# Altium PCB Rotary Encoder.PcbDoc
Units mm, origin at the board's own origin, x right, y up, seen from the top; angles counter-clockwise.
Board outline 55 x 55 mm, 2 copper layers (Top Layer, Bottom Layer), stack 1.621 mm thick; 24 components, 16 nets, 65 pads, 4 vias.
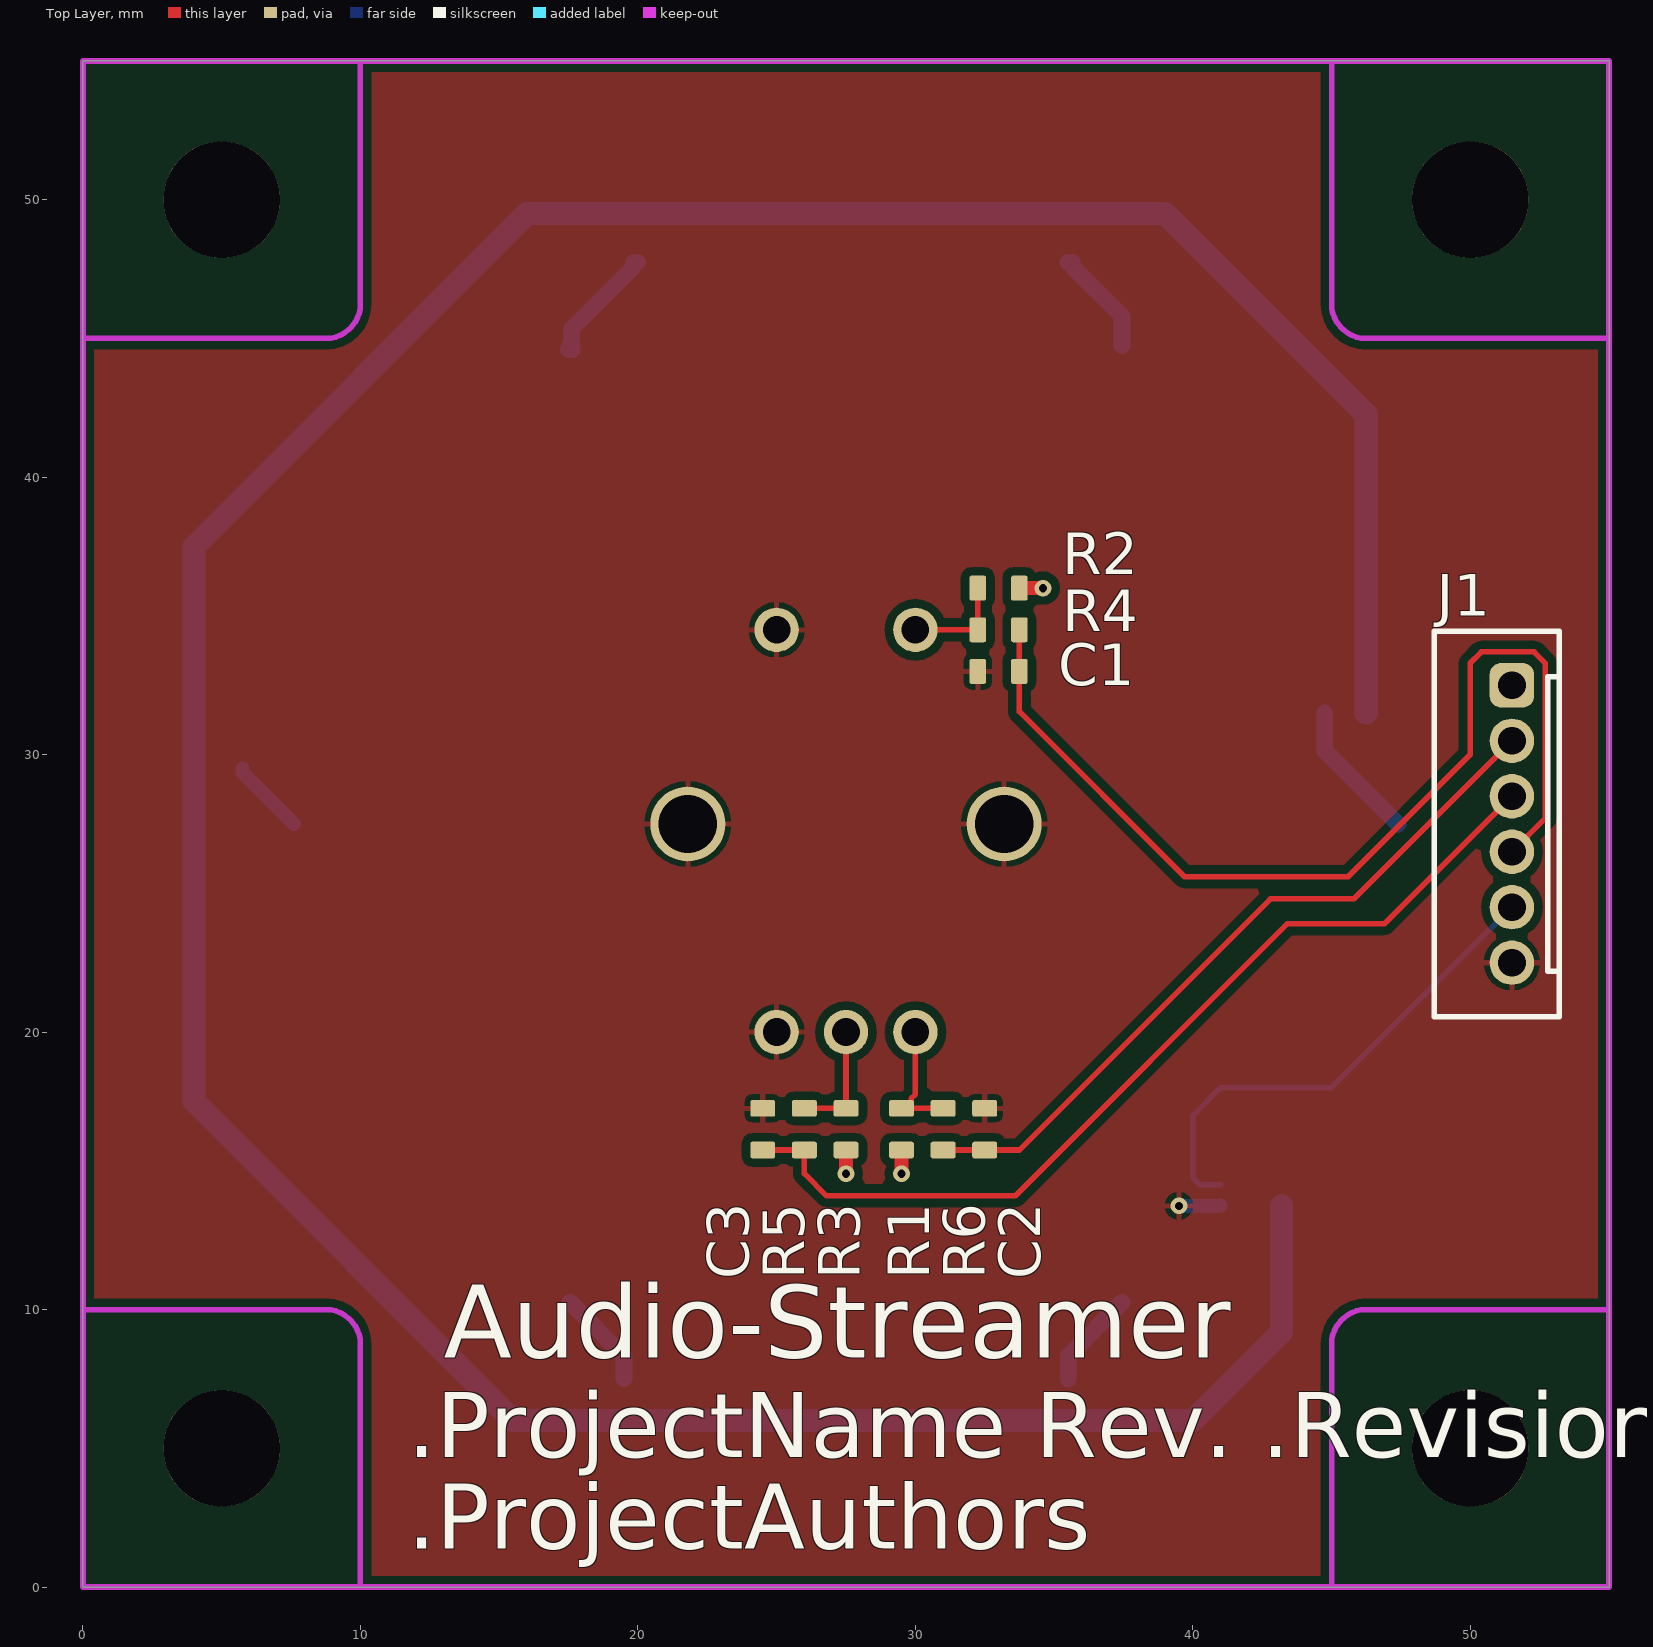
[diagram p0: Top Layer view]
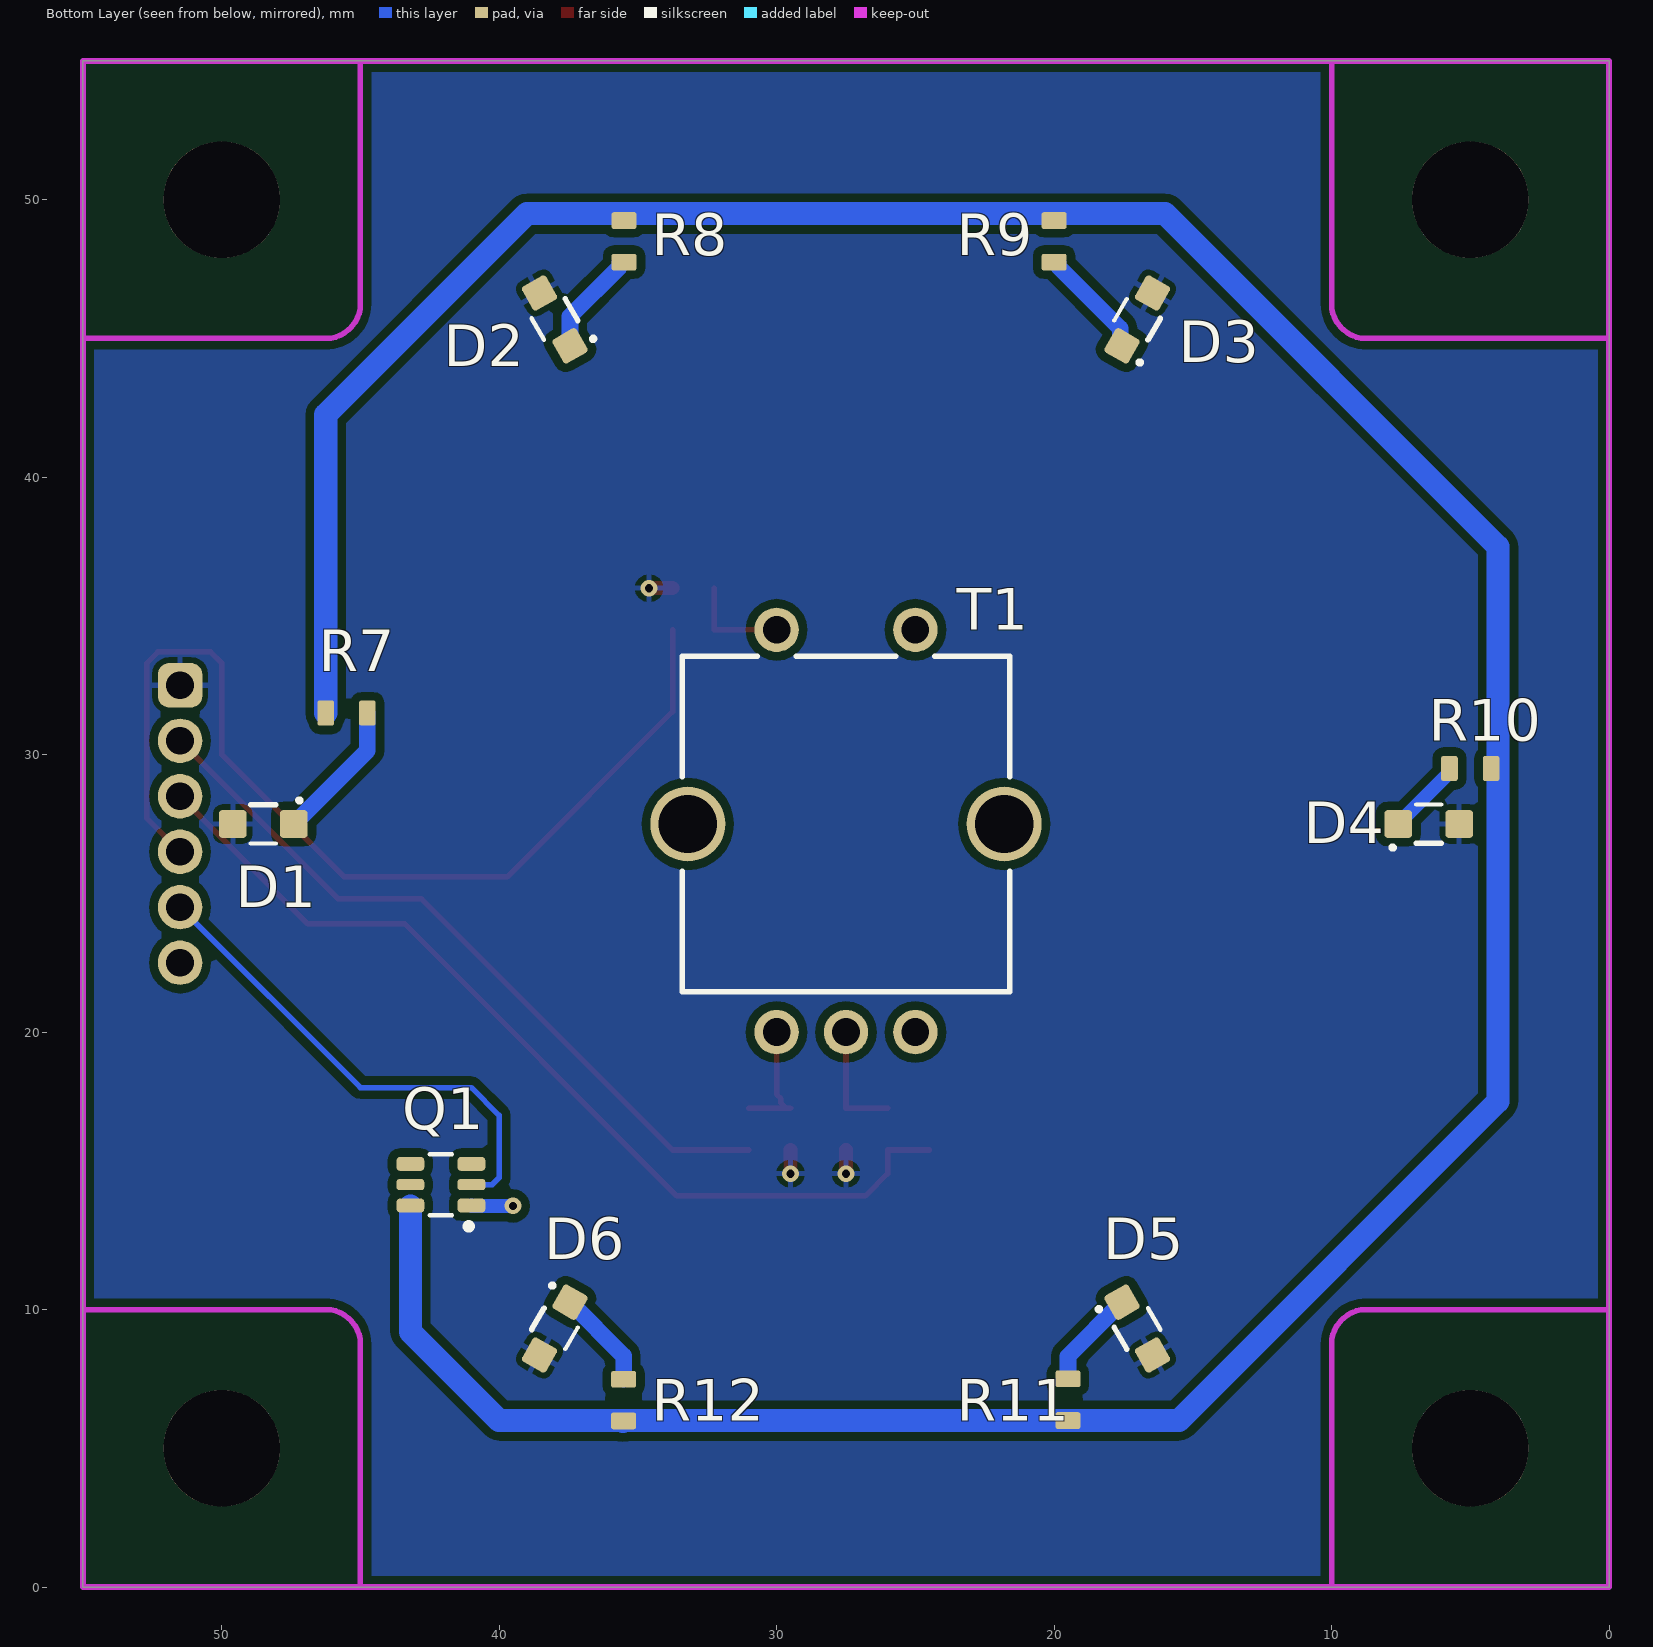
[diagram p1: Bottom Layer view, seen from below]
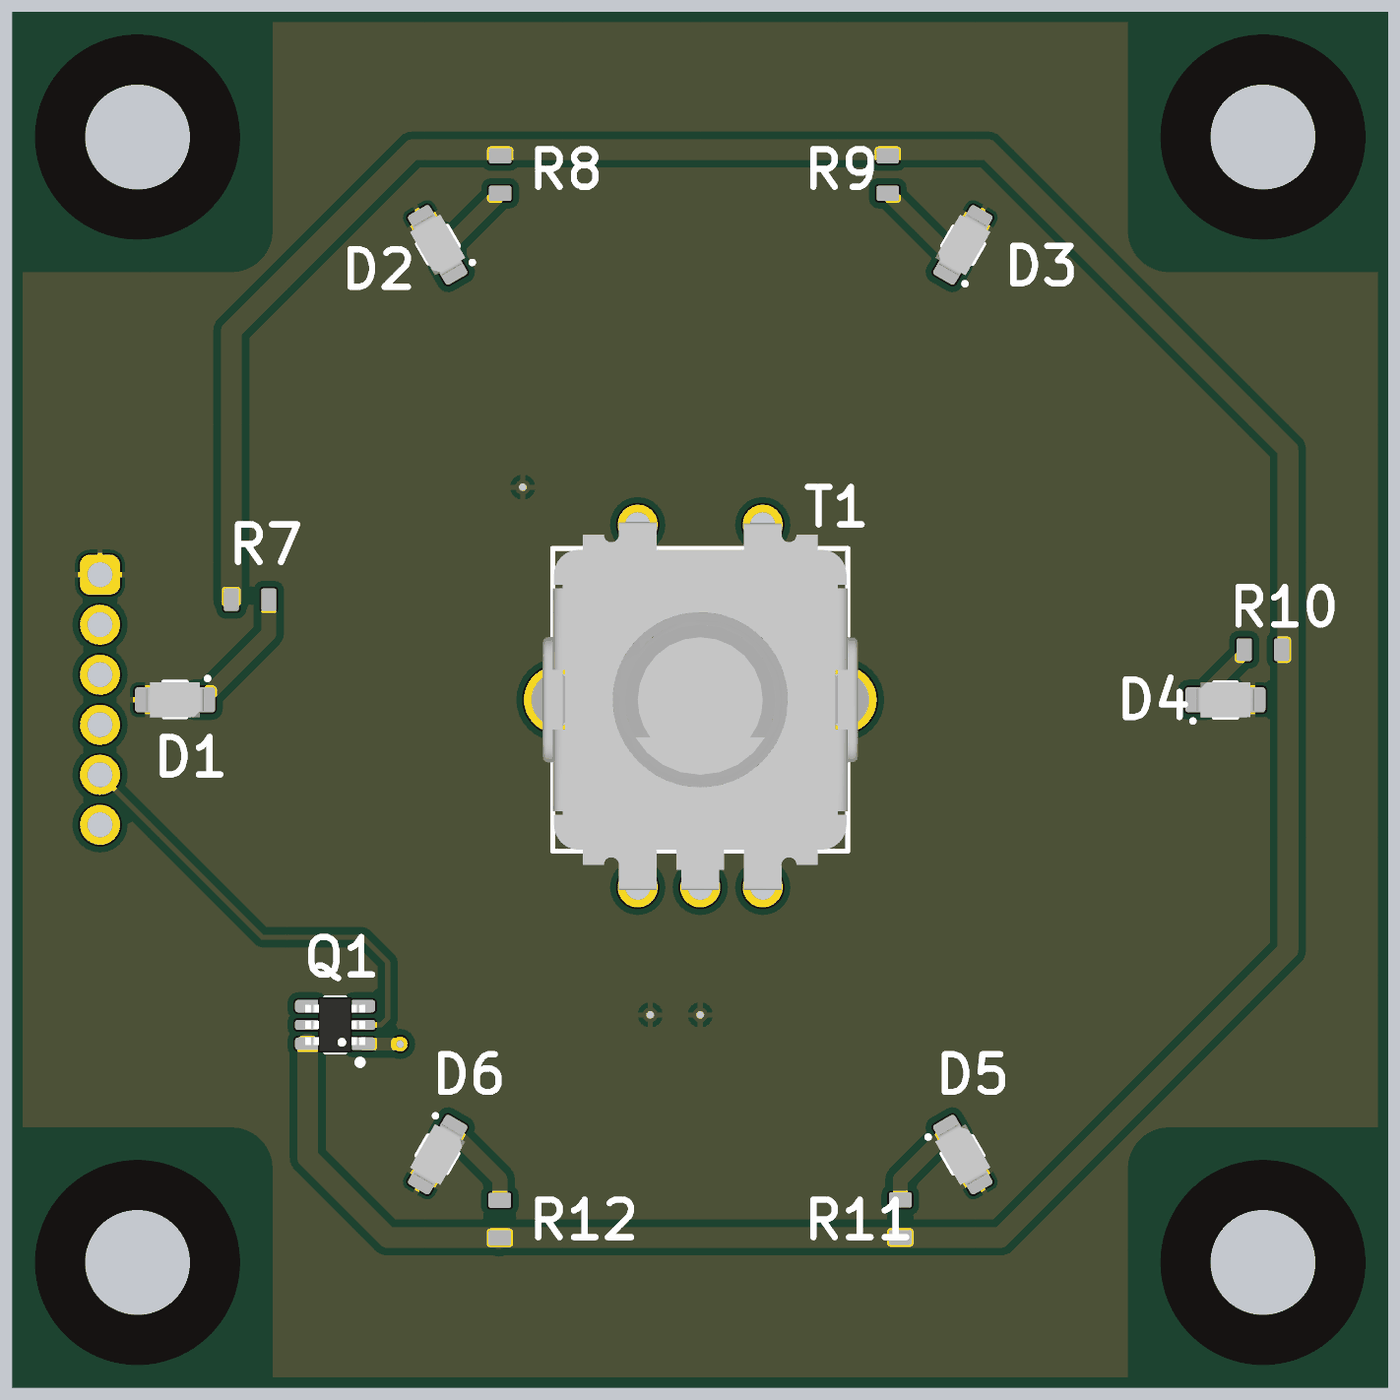
[diagram p2: 3D render of the assembled board from below, using the file's embedded part models]

## Layer stack, top to bottom
Top Solder: solder mask 0.0102, Solder Resist, Dk 3.5
Top Layer: signal copper 0.0356
Dielectric 1: dielectric 1.55, FR-4, Dk 4.3
Bottom Layer: signal copper 0.0356
Bottom Solder: solder mask 0.0102, Solder Resist, Dk 3.5

## Board outline
0,0 55,0 55,55 0,55

## Design rules (kind name [scope] priority, off if disabled: settings)
Clearance Clearance_1 [InPolygon] p1: gap=0.15 ignorepadtopadclearanceinfootprint=FALSE except(0: Arc-Hole Track-Hole SMDPad-Hole THPad-Hole Via-Hole Fill-Hole Poly-Hole Region-Hole Text-Hole; 0.3: Arc-Fill Arc-Poly Arc-Region Track-Fill Track-Poly Track-Region SMDPad-Fill SMDPad-Poly SMDPad-Region THPad-Fill THPad-Poly THPad-Region Via-Fill Via-Poly Via-Region Fill-Fill Fill-Poly Fill-Region Poly-Poly Poly-Region Region-Region)
Clearance [All] p2: gap=0.15 ignorepadtopadclearanceinfootprint=FALSE except(0: Arc-Hole Track-Hole SMDPad-Hole THPad-Hole Via-Hole Fill-Hole Poly-Hole Region-Hole Text-Hole)
DiffPairsRouting [All] p1: maxlimit=10 minlimit=0.125 mostfreqgap=0.15 toplayer_minwidth=0.381 toplayer_maxwidth=0.381 toplayer_prefwidth=0.381 bottomlayer_minwidth=0.381 bottomlayer_maxwidth=0.381 bottomlayer_prefwidth=0.381 maxuncoupledlength=12.7
FabricationTestPointUsage FabricationTestPointUsage_1 [All] p1: valid=0 allowmultiple=FALSE
FabricationTestpoint FabricationTestpoint_1 [All] p1: side=3 testpointundercomponent=TRUE minsize=1.016 maxsize=2.54 preferedsize=1.524 minholesize=0 maxholesize=1.016 preferedholesize=0.813 testpointgrid=0.025 allowsidetop=TRUE allowsidebottom=TRUE usegrid=TRUE gridtolerance=0
HoleSize [All] p1: absolutevalues=TRUE maxlimit=6 minlimit=0.2 maxpercent=80.000 minpercent=20.000
HoleSize FabricationTestpoint [All] p2 off: absolutevalues=TRUE maxlimit=2.54 minlimit=0.025 maxpercent=80.000 minpercent=20.000
HoleSize FabricationTestPointUsage [All] p3 off: absolutevalues=TRUE maxlimit=2.54 minlimit=0.025 maxpercent=80.000 minpercent=20.000
MinimumAnnularRing [All] p1: minimumring=0.15
MinimumSolderMaskSliver [All] p1: minsoldermaskwidth=0.1
PlaneClearance [All] p1: clearance=0.5
PlaneConnect [All] p1: planeconnectstyle=Relief reliefexpansion=0.4 reliefentries=4 reliefconductorwidth=0.15 reliefairgap=0.15
PolygonConnect [All] p1: connectstyle=Relief reliefconductorwidth=0.2 reliefentries=4 polygonreliefangle="90 Angle" airgapwidth=0.2
RoutingCorners [All] p1: cornerstyle=45-Degree minsetback=1.25 maxsetback=1.25
RoutingVias [All] p1: holewidth=0.3 width=0.6 viastyle="Through Hole" minholewidth=0.2 minwidth=0.45 maxholewidth=0.45 maxwidth=0.75
SilkToSilkClearance [All] p1: silktosilkclearance=0.1
SilkToSolderMaskClearance [IsPad] p1: minsilkscreentomaskgap=0.1 clearancetoexposedcopper=TRUE
SolderMaskExpansion [All] p1: expansion=0.075
Width [All] p1: maxlimit=10 minlimit=0.125 preferedwidth=0.15
20 further rules are at their usual default settings.

## Components (designator, comment, footprint, x,y, rotation, side; value= is the part's Value field where it differs from the comment)
C1 "10nF" SMD0603CAP 33,33 r180 top
C2 "10nF" SMD0603CAP 32.5,16.5 r90 top
C3 "10nF" SMD0603CAP 24.5,16.5 r90 top
D1 "blue" LED 48.5,27.5 r180 bottom
D2 "blue" LED 38,45.687 r240 bottom
D3 "blue" LED 17,45.687 r300 bottom
D4 "blue" LED 6.5,27.5 r0 bottom
D5 "blue" LED 17,9.313 r60 bottom
D6 "blue" LED 38,9.313 r120 bottom
J1 "B6B-PHK-S" B6B-PH-K-S 51.5,32.5 r90 top
Q1 "SQ1539EH-T1_GE3" SOT-363-6 42.1,14.5 r90 bottom
R1 "10kΩ" SMD0603RES 29.5,16.5 r90 top
R2 "10kΩ" SMD0603RES 33,36 r180 top
R3 "10kΩ" SMD0603RES 27.5,16.5 r90 top
R4 "10kΩ" SMD0603RES 33,34.5 r180 top
R5 "10kΩ" SMD0603RES 26,16.5 r90 top
R6 "10kΩ" SMD0603RES 31,16.5 r90 top
R7 "270Ω" SMD0603RES 45.5,31.5 r180 bottom
R8 "270Ω" SMD0603RES 35.5,48.5 r270 bottom
R9 "270Ω" SMD0603RES 20,48.5 r270 bottom
R10 "270Ω" SMD0603RES 5,29.5 r0 bottom
R11 "270Ω" SMD0603RES 19.5,6.75 r90 bottom
R12 "270Ω" SMD0603RES 35.514,6.736 r90 bottom
T1 "PEC11L-4220F-S0015" PEC11L-4220F-S0015 27.5,27.5 r180 bottom

## Footprints (in the part's own frame and the unit in brackets; to place one, negate y for a bottom-side part, rotate by r counter-clockwise, add the part's x,y. Pads: shape width x height; smd on the part's side, far side on the other; paste and mask are expansions set on the pad)
B6B-PH-K-S [mm] "JST PH plug"
  rrect50% 1.6x1.6 hole 1: 1(0,0)
  round 1.6 hole 1: 2(-2,0) 3(-4,0) 4(-6,0) 5(-8,0) 6(-10,0)
  silkscreen extent -11.95,-1.7 1.95,2.8, body extent -11.95,-1.7 1.95,2.8, height 6
LED [mm]
  rrect25% 1x1 smd: A(-1.1,0) C(1.1,0)
  silkscreen extent -0.45,-0.7 1.35,0.9, body extent -1.15,-0.7 1.15,0.7, height 1.2
PEC11L-4220F-S0015 [mm] "Rotary Encoder"
  round 2.7 hole 2.1: 0(-5.7,0) 0(5.7,0)
  round 1.6 hole 1: 1(-2.5,7) 2(2.5,7) A(-2.5,-7.5) B(0,-7.5) C(2.5,-7.5)
  silkscreen extent -5.9,-6.05 5.9,6.05, body extent -6.92,-7.6 6.92,7.1, height 24.6
SMD0603CAP [mm]
  rrect25% 0.6x0.9 smd: 1(-0.75,0) 2(0.75,0)
  body extent -0.75,-0.4 0.75,0.4, height 0.45
SMD0603RES [mm]
  rrect25% 0.6x0.9 smd: 1(-0.75,0) 2(0.75,0)
  body extent -0.75,-0.4 0.75,0.4, height 0.45
SOT-363-6 [mm] "SOT-363-6"
  rrect50% 0.5x1 smd: 1(-0.75,-1.1) 3(0.75,-1.1) 4(0.75,1.1) 6(-0.75,1.1)
  rrect50% 0.4x1 smd: 2(0,-1.1) 5(0,1.1)
  silkscreen extent -1.6,-1.1 1.1,0.4, body extent -1.1,-1.2 1.1,1.2, height 1.1

## Part data
C1 C2 C3: library part "Capacitor Ceramic", "Ceramic Capacitor"
D1 D2 D3 D4 D5 D6: library part "LED red", "LED red", Manufacturer Part No.="LB M673-M1N2-35-Z"
J1: library part "Connector 6x1P", "Connector 6x1P", Manufacturer Part No.=B6B-PHK-S, System=Connector
Q1: library part "Transistor N/PMOS Dual", "Transistor Dual, NMOS & PMOS", Manufacturer Part No.=SQ1539EH-T1_GE3
R1 R2 R3 R4 R5 R6 R7 R8 R9 R10 R11 R12: library part Resistor, "Resistor"
T1: library part "Rotary Encoder", "Rotary Encoder with button", Manufacturer Part No.=PEC11L-4220F-S0015

## Free pads (board coordinates)
  round 4.2 hole 4.2 unplated mask+2: ""(5,5) ""(5,50) ""(50,5) ""(50,50)

## Via types
v1: diameter 0.6, hole 0.3, Top Layer to Bottom Layer, tented both sides, 3 vias
v2: diameter 0.6, hole 0.3, Top Layer to Bottom Layer, 1 vias

## Nets (pads, with @x,y where several pads share a name; then routed paths per layer and width w, separated by ;. In a path a pad name is that pad's centre, name@x,y a point inside that pad or via, vN(x,y) a via of type N, cw(c..) or ccw(c..) an arc to the next point about the centre after c; other vN are vias at no path point)
+3.3V: D1.A D2.A D3.A D4.A D5.A D6.A J1.1 R1.1 R2.1 R3.1 | length 2.5
  Top Layer w0.5: v1(27.5,14.9) R3.1 ; v1(29.5,14.9) R1.1 ; R2.1 v1(34.6,36)
ENC_A: C2.1 J1.2 R6.1 | length 26.6
  Top Layer w0.2: R6.1 C2.1 33.75,15.75 42.8,24.8 45.8,24.8 J1.2
ENC_B: C3.1 J1.3 R5.1 | length 34.1
  Top Layer w0.2: C3.1 R5.1 26,14.9 26.8,14.1 33.6,14.1 43.4,23.9 46.9,23.9 J1.3
ENC_BKL: J1.5 Q1.2 | length 18
  Bottom Layer w0.2: Q1.2 40.25,14.5 40,14.75 40,17 41,18 45,18 J1.5
ENC_BTN: C1.1 J1.4 R4.1 | length 37.1
  Top Layer w0.2: R4.1 C1.1 33.75,31.55 39.7,25.6 45.6,25.6 50,30 50,33.3 50.4,33.7 52.3,33.7 52.7,33.3 52.7,27.7 J1.4
GND: C1.2 C2.2 C3.2 J1.6 Q1.1 T1.0 T1.2 T1.C | length 1.5
  Bottom Layer w0.5: v2(39.5,13.735) 40.985,13.735 Q1.1
NetD1_C: D1.C R7.2 | length 5.1
  Bottom Layer w0.6: R7.2 44.75,30.15 D1.C
NetD2_C: D2.C R8.2 | length 3.9
  Bottom Layer w0.6: R8.2 35.65,47.75 35.65,47.6 37.45,45.8 D2.C
NetD3_C: D3.C R9.2 | length 4.3
  Bottom Layer w0.6: D3.C@17.5,44.6 D3.C@17.639,44.6 ; D3.C 17.615,44.799 17.615,45.365 19.85,47.6 19.85,47.75 R9.2
NetD4_C: D4.C R10.2 | length 2.8
  Bottom Layer w0.5: R10.2 5.75,29.35 D4.C
NetD5_C: D5.C R11.2 | length 3.6
  Bottom Layer w0.6: D5.C 19.5,8.316 R11.2
NetD6_C: D6.C R12.2 | length 3.6
  Bottom Layer w0.6: R12.2 35.514,8.33 D6.C
NetQ1_6: Q1.6 R7.1 R8.1 R9.1 R10.1 R11.1 R12.1 | length 130.8
  Bottom Layer w0.83: R12.1 R12.1@35.543,5.957 ; Q1.6@43.2,13.735 43.2,9.2 40,6 R11.1 15.5,6 4,17.5 4,29.5 4,37.5 16,49.5 20,49.5 35.5,49.5 39,49.5 46.25,42.25 R7.1
NetR1_2: R1.2 R6.2 T1.A | length 4.4
  Top Layer w0.2: R1.2 R1.2@29.65,17.25 ; T1.A 30,17.75 29.85,17.6 29.85,17.45 R1.2@29.65,17.25 ; R6.2 R1.2@29.65,17.25
NetR2_2: R2.2 R4.2 T1.1 | length 3.8
  Top Layer w0.2: T1.1 R4.2 R2.2
NetR3_2: R3.2 R5.2 T1.B | length 4.3
  Top Layer w0.2: R5.2 R3.2 T1.B
pads on no net: Q1.3 Q1.4 Q1.5

## Polygon pours and split planes (outlines as drawn)
+3.3V on Bottom Layer "Bottom +3.3V" (solid, remove dead copper, pour order 0): 0,55 55,55 55,0 0,0
GND on Top Layer "Top GND" (solid, remove dead copper, pour order 2): 0,0 55,0 55,55 0,55

## Keep-outs
Keep-Out Layer:
  lines w0.2: 0,10 8.75,10 cw(c8.75,8.75) 10,8.75 10,0 ; 0,45 8.75,45 ccw(c8.75,46.25) 10,46.25 10,55 ; 45,55 45,46.25 ccw(c46.25,46.25) 46.25,45 55,45 ; 55,10 46.25,10 ccw(c46.25,8.75) 45,8.75 45,0 0,0 ; 0,0 0,55 55,55 55,0 0,0

## Silkscreen, mask and mechanical layers (free items; w line width, h text height)
Top Overlay:
  text "Audio-Streamer" at 13,7.4 h4.5
  text ".ProjectName Rev. .Revision" at 11.7,3.9 h4
  text ".ProjectAuthors" at 11.7,0.6 h4
Top Solder:
  text "B" at 13.5,42 h12
Mechanical 1:
  the board outline again, w0.1